# Altium PCB Tigershark 3D R1.6.PcbDoc (part 2 of 4)
Units mil, origin at the board's own origin, x right, y up, seen from the top; angles counter-clockwise.
Board outline 5500 x 4600 mil, 4 copper layers (Top Layer, Groun Plane, Power Plane, Bottom Layer); 326 components, 251 nets, 1041 pads, 903 vias.
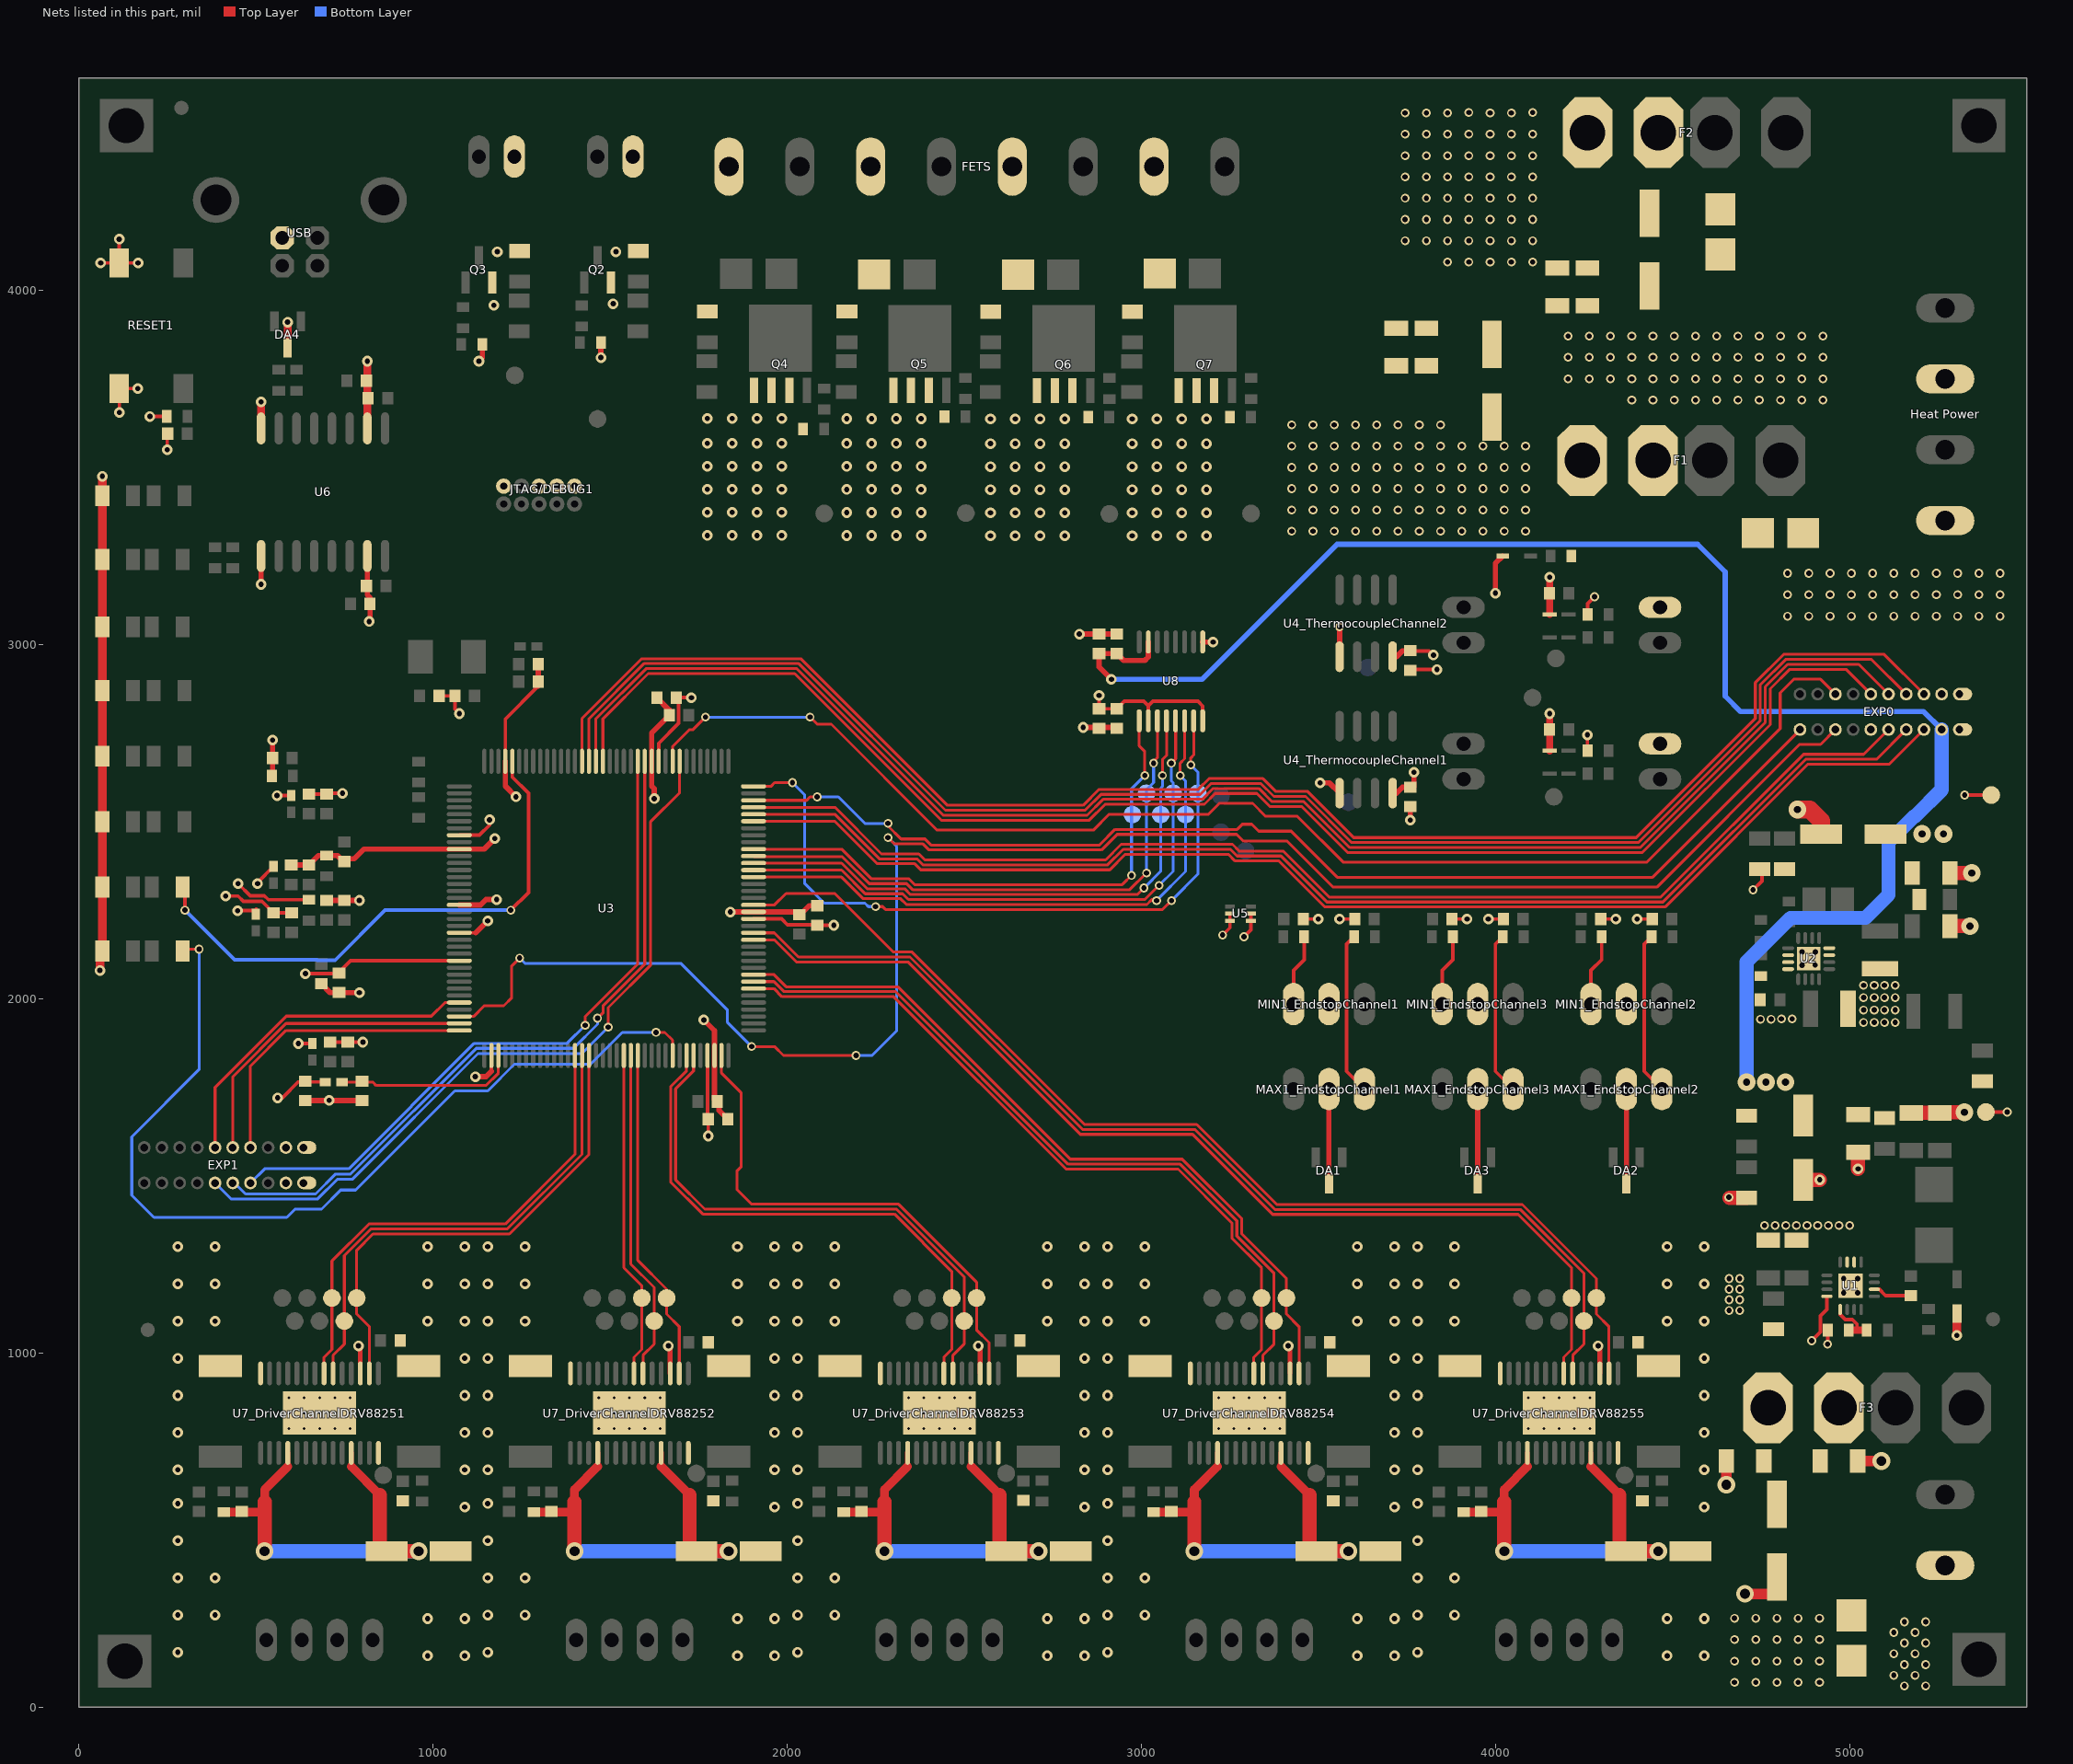
[diagram p4: the nets of this part, all layers, seen from the top]

## Part data
C1_EndstopChannel1 C1_EndstopChannel2 C1_EndstopChannel3 C2_EndstopChannel1 C2_EndstopChannel2 C2_EndstopChannel3 C4 C5 C6 C9 C13 C14 C15 C17 C18 C19 C20 C22 C23 C24 C25 C26 C27 C28 C29 C32 C33 C34 C35 C36 C37 C38 C39 C40 C41 C42 C43 C44 C45 C46 C47 C48 C52 C53 C54 C55 C56 C57 C58 C59 C60 C61 C64 C65 C66_DriverChannelDRV88251 C66_DriverChannelDRV88252 C66_DriverChannelDRV88253 C66_DriverChannelDRV88254 C66_DriverChannelDRV88255 C68_DriverChannelDRV88251 C68_DriverChannelDRV88252 C68_DriverChannelDRV88253 C68_DriverChannelDRV88254 C68_DriverChannelDRV88255 C71_DriverChannelDRV88251 C71_DriverChannelDRV88252 C71_DriverChannelDRV88253 C71_DriverChannelDRV88254 C71_DriverChannelDRV88255 C73 C75_DriverChannelDRV88251 C75_DriverChannelDRV88252 C75_DriverChannelDRV88253 C75_DriverChannelDRV88254 C75_DriverChannelDRV88255: library part "Cap Semi", "Capacitor (Semiconductor SIM Model)"
C3 C12 C16 C69_DriverChannelDRV88251 C69_DriverChannelDRV88252 C69_DriverChannelDRV88253 C69_DriverChannelDRV88254 C69_DriverChannelDRV88255: library part "Cap Pol1", "Polarized Capacitor (Radial)"
C7 C8 C10 C11 C30_ThermistorChannel1 C30_ThermistorChannel2 C31_ThermocoupleChannel1 C31_ThermocoupleChannel2 C63: "Capacitor (Semiconductor SIM Model)"
D1: library part "D Zener", "Zener Diode"
D2 D3 D7 D9 D20 D21 D22 D23 D24 D25: "Typical RED, GREEN, YELLOW, AMBER GaAs LED"
D4 D6 D8 D12 D15 D17 D19: library part "D Schottky", "Schottky Diode"
D5: "Default Diode"
D10 D11 D13 D14 D16 D18: "Typical RED GaAs LED"
D11_ThermistorChannel1 D11_ThermistorChannel2 D12_ThermistorChannel1 D12_ThermistorChannel2: "High Conductance Fast Diode"
DA1 DA2 DA3 DA4: "PESDxL2BT TVS Diode Array 2x"
F1 F2 F3 F4: library part "Fuse 1", "Fuse"
FB2 FB3 L2: library part Inductor, "Inductor"
FETS: library part con-phoenix-508
"Heat Power": library part con-phoenix-508_4
M1_DriverChannelDRV88251 M1_DriverChannelDRV88252 M1_DriverChannelDRV88253 M1_DriverChannelDRV88254 M1_DriverChannelDRV88255: library part "Molex 0705430003 Alt", "Molex 4 Pin Clip Connector"
MAX1_EndstopChannel1 MAX1_EndstopChannel2 MAX1_EndstopChannel3 MIN1_EndstopChannel1 MIN1_EndstopChannel2 MIN1_EndstopChannel3: library part "Molex Endstop"
"Motor Power": library part con-phoenix-508_2
Q2 Q3 Q4 Q5 Q6 Q7: "N-Channel MOSFET"
R1 R7 R8 R9 R10 R11 R13_ThermistorChannel1 R13_ThermistorChannel2 R14_ThermistorChannel1 R14_ThermistorChannel2 R21 R24 R25: "Resistor"
R2_EndstopChannel1 R2_EndstopChannel2 R2_EndstopChannel3 R3_EndstopChannel1 R3_EndstopChannel2 R3_EndstopChannel3 R4 R5 R6 R12 R13 R15 R16 R18 R19 R20 R22 R23 R28 R29 R30_DriverChannelDRV88251 R30_DriverChannelDRV88252 R30_DriverChannelDRV88253 R30_DriverChannelDRV88254 R30_DriverChannelDRV88255 R31_DriverChannelDRV88251 R31_DriverChannelDRV88252 R31_DriverChannelDRV88253 R31_DriverChannelDRV88254 R31_DriverChannelDRV88255 R32_DriverChannelDRV88251 R32_DriverChannelDRV88252 R32_DriverChannelDRV88253 R32_DriverChannelDRV88254 R32_DriverChannelDRV88255 R33_DriverChannelDRV88251 R33_DriverChannelDRV88252 R33_DriverChannelDRV88253 R33_DriverChannelDRV88254 R33_DriverChannelDRV88255 R34 R35 R36 R37 R38 R39 R40 R45 R46 R47 R52 R55 R56 R58 R59 R60 R62 R63 R64 R66 R67 R68 R70 R71: library part Res3, "Resistor"
TP1 TP2 TP3 TP4 TP5 TP6 TP7 TP8 TP32_DriverChannelDRV88251 TP32_DriverChannelDRV88252 TP32_DriverChannelDRV88253 TP32_DriverChannelDRV88254 TP32_DriverChannelDRV88255 TP33_DriverChannelDRV88251 TP33_DriverChannelDRV88252 TP33_DriverChannelDRV88253 TP33_DriverChannelDRV88254 TP33_DriverChannelDRV88255 TP34_DriverChannelDRV88251 TP34_DriverChannelDRV88252 TP34_DriverChannelDRV88253 TP34_DriverChannelDRV88254 TP34_DriverChannelDRV88255 TP35_DriverChannelDRV88251 TP35_DriverChannelDRV88252 TP35_DriverChannelDRV88253 TP35_DriverChannelDRV88254 TP35_DriverChannelDRV88255 TP36_DriverChannelDRV88251 TP36_DriverChannelDRV88252 TP36_DriverChannelDRV88253 TP36_DriverChannelDRV88254 TP36_DriverChannelDRV88255 TP37_DriverChannelDRV88251 TP37_DriverChannelDRV88252 TP37_DriverChannelDRV88253 TP37_DriverChannelDRV88254 TP37_DriverChannelDRV88255 TP38 TP39_DriverChannelDRV88251 TP39_DriverChannelDRV88252 TP39_DriverChannelDRV88253 TP39_DriverChannelDRV88254 TP39_DriverChannelDRV88255 TP40_DriverChannelDRV88251 TP40_DriverChannelDRV88252 TP40_DriverChannelDRV88253 TP40_DriverChannelDRV88254 TP40_DriverChannelDRV88255 TP41 TP42 TP43 TP44 TP45 TP46 TP47 TP48 TP49 TP50 TP51 TP52_ThermistorChannel1 TP52_ThermistorChannel2: library part Socket, "Socket"
U2: "Buck Step Down Regulator with 3 to 17 V Input and 3.3 V Output, -40 to 85 degC, 16-Pin QFN (RGT), Green (RoHS & no Sb/Br)"
U4_ThermocoupleChannel1 U4_ThermocoupleChannel2: "Cold Junction Compensated Thermocouple to Digital Converter, 14 Bits Temperature Resolution, -40 to 125 degC, 8-Pin SOIC (S8+4), Pb-Free"
U6: "USB Opto Isolator"
U7_DriverChannelDRV88251 U7_DriverChannelDRV88252 U7_DriverChannelDRV88253 U7_DriverChannelDRV88254 U7_DriverChannelDRV88255: "DRV8825 Ti Stepper Driver"
U8: library part TXB0106, "TXB0106 - Bidriectional Opendrain/pushpull level shift"
X2: library part XTAL, "Crystal Oscillator"

## Free pads (board coordinates)
  rect 150x150 hole 100: ""(130,130) ""(135,4465) ""(5365,135) ""(5365,4465)

## Via types
v1: diameter 25, hole 15, Top Layer to Bottom Layer, tented both sides, 432 vias
v2: diameter 30, hole 15, Top Layer to Bottom Layer, tented both sides, 366 vias
v3: diameter 19.68, hole 7.87, Top Layer to Bottom Layer, tented both sides, 75 vias
v4: diameter 50, hole 28, Top Layer to Bottom Layer, tented both sides, 13 vias
v5: diameter 50, hole 20, Top Layer to Bottom Layer, tented both sides, 9 vias
v6: diameter 25, hole 15, Top Layer to Bottom Layer, tented bottom, 8 vias

## Nets (pads, with @x,y where several pads share a name; then routed paths per layer and width w, separated by ;. In a path a pad name is that pad's centre, name@x,y a point inside that pad or via, vN(x,y) a via of type N, cw(c..) or ccw(c..) an arc to the next point about the centre after c; other vN are vias at no path point)
3.3VCC: C23.1 C25.2 C26.1 C31_ThermocoupleChannel1.2 C31_ThermocoupleChannel2.2 C35.1 C45.2 C46.2 C47.2 C48.2 C64.2 EXP0.12 EXP1.9 EXP1.12 FB3.2 FB5.1 FB6.1 FB7.1 FB8.1 FB9.1 JTAG/DEBUG1.1@1400,3447 MAX1_EndstopChannel1.3 MAX1_EndstopChannel2.3 MAX1_EndstopChannel3.3 MIN1_EndstopChannel1.3 MIN1_EndstopChannel2.3 MIN1_EndstopChannel3.3 R2_EndstopChannel1.1 R2_EndstopChannel2.1 R2_EndstopChannel3.1 R3_EndstopChannel1.1 R3_EndstopChannel2.1 R3_EndstopChannel3.1 R6.1 R11.2 R13_ThermistorChannel1.2 R13_ThermistorChannel2.2 R21.2 TP3.1 U3.11 U3.62 U3.105 U3.125 U4_ThermocoupleChannel1.4 U4_ThermocoupleChannel2.4 U5.1 U5.2 U5.5 U5.6 U7_DriverChannelDRV88251.17 U7_DriverChannelDRV88252.17 U7_DriverChannelDRV88253.17 U7_DriverChannelDRV88254.17 U7_DriverChannelDRV88255.17 U8.2 U8.8 | length 5152.1
  Top Layer w10: v2(201,3644) R21.2@248.47,3644 ; v2(449,2248.62) 501.22,2248.62 FB5.1@501.22,2252.8 ; v2(450,2325) 484,2291 524.19,2291 535.66,2279.53 R6.1@650,2279.53 ; v2(505,2325) 505,2328.62 FB7.1@550,2373.62 ; v2(560,2573.62) FB8.1@600,2573.62 ; v2(562,1720) 575,1720 620,1765 FB9.1@696.38,1765 ; v2(620,1873.62) FB6.1@660,1873.62 ; v2(640,2070.81) 715,2070.81 ; C48.2@735,2072.56 735,2075 767.36,2107.36 U3.62@1074.65,2107.36 ; U3.11@1637.64,2670.35 1637.64,2721.18 1694.19,2777.73 1694.19,2843.37 C47.2@1687.56,2850 v2(1730,2850) ; C45.2@1775.43,1660 U3.105@1775.43,1839.65 ; v2(1777.44,1612.56) C45.2@1777.44,1660 ; U3.125@1905.35,2225.47 1984.53,2225.47 2000.81,2209.19 2083.25,2209.19 C46.2@2085,2207.44 v2(2132.44,2207.44) ; v2(2881,2856) C25.2@2881,2818.56 C26.1@2931,2818.56 2952.44,2840 3007,2840 3020.02,2826.98 ; U8.2@3020.02,2784.78 3020.02,2826.98 ; U8.8@3173.57,2784.78 3173.57,2826.43 3160,2840 3033.05,2840 3020.02,2826.98 ; v1(3230,2180) 3250.47,2200.47 U5.6@3250.47,2220.32 U5.5@3250.47,2240 ; v1(3290,2175) 3309.53,2194.53 U5.1@3309.53,2220.32 U5.2@3309.53,2240 ; MIN1_EndstopChannel1.3@3430,1985 3430,2080 3460,2110 R3_EndstopChannel1.1@3460,2175 ; R2_EndstopChannel1.1@3600.95,2175 3580,2154.06 3580,1795 MAX1_EndstopChannel1.3@3630,1745 ; C31_ThermocoupleChannel2.2@3775,2982.05 3812.95,2982.05 v2(3825,2970) ; MIN1_EndstopChannel3.3@3850,1985 3850,2080 3880,2110 R3_EndstopChannel3.1@3880,2175 ; R2_EndstopChannel3.1@4020.95,2175 4000,2154.06 4000,1795 MAX1_EndstopChannel3.3@4050,1745 ; v2(4260,2745) 4260,2700.47 R13_ThermistorChannel1.2@4260.47,2700 ; R13_ThermistorChannel2.2@4260.47,3085 4260.47,3115.47 v1(4280,3135) ; MIN1_EndstopChannel2.3@4270,1985 4270,2080 4300,2110 R3_EndstopChannel2.1@4300,2175 ; R2_EndstopChannel2.1@4440.95,2175 4420,2154.06 4420,1795 MAX1_EndstopChannel2.3@4470,1745 ; v1(5325,2575) TP3.1@5400,2575
  Top Layer w14: v2(790,1020) 795,1020 U7_DriverChannelDRV88251.17@795,942.36 ; v2(1665,1020) 1670,1020 U7_DriverChannelDRV88252.17@1670,942.36 ; v2(2540,1020) 2545,1020 U7_DriverChannelDRV88253.17@2545,942.36 ; v2(3415,1020) 3420,1020 U7_DriverChannelDRV88254.17@3420,942.36 ; v2(4290,1020) 4295,1020 U7_DriverChannelDRV88255.17@4295,942.36
  Top Layer w15: U4_ThermocoupleChannel1.4@3710,2580.51 3721.02,2580.51 3737.56,2597.05 3770,2597.05 v2(3770,2639.49) ; U4_ThermocoupleChannel2.4@3710,2965.51 3721.02,2965.51 3737.56,2982.05 C31_ThermocoupleChannel2.2@3770,2982.05
  other v5: 5205,2465 5265,2465
+5VCC: C9.1 C17.1 C20.1 C34.1 EXP0.9 FB2.2 R8.2 R25.1 TP1.1 U8.15 | length 4612.4
  Top Layer w10: TP1.1@5385,1680 v1@5444,1680
  Top Layer w15: v2(2916,2902) 2881,2937 C20.1@2881,2974.44 C17.1@2931,2974.44 2950.44,2955 3010,2955 3020.02,2965.02 U8.15@3020.02,3007.22
  Bottom Layer w15: v2(2916,2902) 3172,2902 3553,3283 4571,3283 4649,3205 4649,2854 4692,2811 5209,2811 EXP0.9@5260,2760
  Bottom Layer w40: v5(4709.07,1764.53) 4709.07,2104.07 4833.18,2228.18 5045,2228.18 5110,2293.18 5110,2442.12 5183.88,2516 5186,2516 5260,2590 EXP0.9@5260,2760
  other v1: 5445,1680
  other v5: 4764.07,1764.53 4819.07,1764.53
+12VCC1: C16.1 C18.2 C19.2 C66_DriverChannelDRV88251.1 C66_DriverChannelDRV88252.1 C66_DriverChannelDRV88253.1 C66_DriverChannelDRV88254.1 C66_DriverChannelDRV88255.1 C69_DriverChannelDRV88251.1 C69_DriverChannelDRV88252.1 C69_DriverChannelDRV88253.1 C69_DriverChannelDRV88254.1 C69_DriverChannelDRV88255.1 D8.2 F3.2 R24.2 R30_DriverChannelDRV88251.1 R30_DriverChannelDRV88252.1 R30_DriverChannelDRV88253.1 R30_DriverChannelDRV88254.1 R30_DriverChannelDRV88255.1 U7_DriverChannelDRV88251.4 U7_DriverChannelDRV88251.11 U7_DriverChannelDRV88252.4 U7_DriverChannelDRV88252.11 U7_DriverChannelDRV88253.4 U7_DriverChannelDRV88253.11 U7_DriverChannelDRV88254.4 U7_DriverChannelDRV88254.11 U7_DriverChannelDRV88255.4 U7_DriverChannelDRV88255.11 | length 6255.1
  Top Layer w14: 590.43,679.43 U7_DriverChannelDRV88251.4@590.43,717.8 ; 769.57,679.43 U7_DriverChannelDRV88251.11@769.57,717.8 ; 1465.43,679.43 U7_DriverChannelDRV88252.4@1465.43,717.8 ; 1644.57,679.43 U7_DriverChannelDRV88252.11@1644.57,717.8 ; 2340.43,679.43 U7_DriverChannelDRV88253.4@2340.43,717.8 ; 2519.57,679.43 U7_DriverChannelDRV88253.11@2519.57,717.8 ; 3215.43,679.43 U7_DriverChannelDRV88254.4@3215.43,717.8 ; 3394.57,679.43 U7_DriverChannelDRV88254.11@3394.57,717.8 ; 4090.43,679.43 U7_DriverChannelDRV88255.4@4090.43,717.8 ; 4269.57,679.43 U7_DriverChannelDRV88255.11@4269.57,717.8
  Top Layer w25: R30_DriverChannelDRV88251.1@410,550.47 525,550.47 ; 525,580 525,614 590.43,679.43 ; 769.57,679.43 850,599 ; R30_DriverChannelDRV88252.1@1285,550.47 1400,550.47 ; 1400,580 1400,614 1465.43,679.43 ; 1644.57,679.43 1725,599 ; R30_DriverChannelDRV88253.1@2160,550.47 2275,550.47 ; 2275,580 2275,614 2340.43,679.43 ; 2519.57,679.43 2600,599 ; R30_DriverChannelDRV88254.1@3035,550.47 3150,550.47 ; 3150,580 3150,614 3215.43,679.43 ; 3394.57,679.43 3475,599 ; R30_DriverChannelDRV88255.1@3910,550.47 4025,550.47 ; 4025,580 4025,614 4090.43,679.43 ; 4269.57,679.43 4350,599
  Top Layer w40: v4(525,440) 525,580 ; C69_DriverChannelDRV88251.1@850,440.55 850,599 ; C69_DriverChannelDRV88251.1@869.45,440 v4(960,440) ; v4(1400,440) 1400,580 ; C69_DriverChannelDRV88252.1@1725,440.55 1725,599 ; C69_DriverChannelDRV88252.1@1744.45,440 v4(1835,440) ; v4(2275,440) 2275,580 ; C69_DriverChannelDRV88253.1@2600,440.55 2600,599 ; C69_DriverChannelDRV88253.1@2619.45,440 v4(2710,440) ; v4(3150,440) 3150,580 ; C69_DriverChannelDRV88254.1@3475,440.55 3475,599 ; C69_DriverChannelDRV88254.1@3494.45,440 v4(3585,440) ; v4(4025,440) 4025,580 ; C69_DriverChannelDRV88255.1@4350,440.55 4350,599 ; C69_DriverChannelDRV88255.1@4369.45,440 v4(4460,440)
  Bottom Layer w40: v4@530,440 v4(960,440) ; v4@1405,440 v4(1835,440) ; v4@2280,440 v4(2710,440) ; v4@3155,440 v4(3585,440) ; v4@4030,440 v4(4460,440)
  other v1: 4675,70 4735,70 4795,70 4855,70 4915,70 4675,130 4735,130 4795,130 4855,130 4915,130 4675,191 4735,191 4795,191 4855,191 4915,191 4675,251 4735,251 4795,251 4855,251 4915,251 4660,1120 4690,1120 4660,1150 4690,1150 4660,1180 4690,1180 4660,1210 4690,1210
+12VCC2: C12.1 C14.2 C15.2 D6.2 D15.2 D17.2 F1.2 FAN-1.1 FAN-2.1 FETS.1 FETS.3 FETS.5 R1.2 R13.1 R47.1 R56.2 R60.2 R64.2
  other v1: 3425,3320 3485,3320 3545,3320 3605,3320 3665,3320 3725,3320 3785,3320 3845,3320 3905,3320 3965,3320 4025,3320 4085,3320 3425,3380 3485,3380 3545,3380 3605,3380 3665,3380 3725,3380 3785,3380 3845,3380 3905,3380 3965,3380 4025,3380 4085,3380 3425,3440 3485,3440 3545,3440 3605,3440 3665,3440 3725,3440 3785,3440 3845,3440 3905,3440 3965,3440 4025,3440 4085,3440 3425,3500 3485,3500 3545,3500 3605,3500 3665,3500 3725,3500 3785,3500 3845,3500 3905,3500 3965,3500 4025,3500 4085,3500 3425,3560 3485,3560 3545,3560 3605,3560 3665,3560 3725,3560 3785,3560 3845,3560 3905,3560 3965,3560 4025,3560 4085,3560 3425,3620 3485,3620 3545,3620 3605,3620 3665,3620 3725,3620 3785,3620 3845,3620
+12VCC3: C3.1 C5.2 C6.2 D4.2 D19.2 F2.2 FETS.7 R68.2
  other v1: 3865,4080 3925,4080 3985,4080 4045,4080 4105,4080 3745,4140 3805,4140 3865,4140 3925,4140 3985,4140 4045,4140 4105,4140 3745,4200 3805,4200 3865,4200 3925,4200 3985,4200 4045,4200 4105,4200 3745,4260 3805,4260 3865,4260 3925,4260 3985,4260 4045,4260 4105,4260 3745,4320 3805,4320 3865,4320 3925,4320 3985,4320 4045,4320 4105,4320 3745,4380 3805,4380 3865,4380 3925,4380 3985,4380 4045,4380 4105,4380 3745,4441 3805,4441 3865,4441 3925,4441 3985,4441 4045,4441 4105,4441 3745,4501 3805,4501 3865,4501 3985,4501 4045,4501 3925,4502 4105,4502
AVREF: C65.2 FB9.2 U3.75 | length 509.5
  Top Layer w8: FB9.2@743.62,1765 830,1765 840,1755 1149.75,1755 1184.88,1790.13 U3.75@1184.88,1839.65
BED_PWM: TP38.1 U3.144 U8.7 | length 2039.8
  Top Layer w8: U3.144@1905.35,2599.49 1954.49,2599.49 1965,2610 v1(2015,2610) ; v1(2250,2260) 2270,2260 2278,2252 3060.14,2252 v1@3087.78,2279.64 ; v1(3140,2660) 3140,2680 3148.39,2688.39 U8.7@3148.39,2784.78
  Bottom Layer w8: v1(2015,2610) 2050,2575 2050,2325 2105,2270 2220,2270 2230,2260 v1(2250,2260) ; v1@3087.78,2279.64 3160,2351.86 3160,2640 v1(3140,2660)
  other v1: 3085.71,2277.22
BST: C7.2 U1.10 | length 110.4
  Top Layer w10: U1.10@5070,1179.68 5083.66,1179.68 5101.37,1161.97 C7.2@5173.07,1161.97
DIR1: TP39_DriverChannelDRV88251.1 U3.87 U7_DriverChannelDRV88251.20 | length 1414
  Top Layer w8: U7_DriverChannelDRV88251.20@718.39,942.2 718.39,993.39 750,1025 TP39_DriverChannelDRV88251.1@750,1090 750,1274.8 825.2,1350 1210.2,1350 1421,1560.8 1421,1839.54 U3.87@1421.1,1839.65
DIR2: TP39_DriverChannelDRV88252.1 U3.94 U7_DriverChannelDRV88252.20 | length 937.9
  Top Layer w8: U3.94@1558.9,1839.65 1558.9,1251.1 1625,1185 TP39_DriverChannelDRV88252.1@1625,1090 1625,1025 1593.39,993.39 U7_DriverChannelDRV88252.20@1593.39,942.2
DIR3: TP39_DriverChannelDRV88253.1 U3.103 U7_DriverChannelDRV88253.20 | length 1586
  Top Layer w8: U3.103@1736.06,1839.65 1736.06,1796.06 1685.32,1745.32 1685.32,1488.67 1767.99,1406 2309.2,1406 2500,1215.2 TP39_DriverChannelDRV88253.1@2500,1090 2500,1025 2468.39,993.39 U7_DriverChannelDRV88253.20@2468.39,942.2
DIR4: TP39_DriverChannelDRV88254.1 U3.116 U7_DriverChannelDRV88254.20 | length 2131.7
  Top Layer w8: U3.116@1905.35,2048.31 1963.1,2048.31 1991.53,2019.88 2306.73,2019.88 2793.61,1533 3109.99,1533 3270,1372.99 3270,1330 3375,1225 TP39_DriverChannelDRV88254.1@3375,1090 3375,1025 3343.39,993.39 U7_DriverChannelDRV88254.20@3343.39,942.2
DIR5: TP39_DriverChannelDRV88255.1 U3.123 U7_DriverChannelDRV88255.20 | length 3038.8
  Top Layer w8: U3.123@1905.35,2186.1 1964.1,2186.1 2032.32,2117.88 2347.32,2117.88 2834.2,1631 3150.99,1631 3376.99,1405 4070.2,1405 4250,1225.2 TP39_DriverChannelDRV88255.1@4250,1090 4250,1025 4218.39,993.39 U7_DriverChannelDRV88255.20@4218.39,942.2
DIR_EXP1: EXP1.6 U3.13 | length 2026.6
  Top Layer w8: v1(1465,1945) 1481,1961 1481,1980.8 1598.27,2098.07 U3.13@1598.27,2670.35
  Bottom Layer w8: EXP1.6@445,1475 471,1449 669,1449 725,1505 767.6,1505 1122.6,1860 1396.82,1860 1465,1928.18 v1(1465,1945)
DIR_EXP2: EXP1.15 U3.71 | length 901.7
  Top Layer w8: EXP1.15@435,1580 435,1779.8 585.4,1930.2 U3.71@1074.65,1930.2
DRV_RESET1: TP34_DriverChannelDRV88251.1 U3.88 U7_DriverChannelDRV88251.16 | length 1409.4
  Top Layer w8: U7_DriverChannelDRV88251.16@820.75,942.2 820.75,1074.25 785,1110 TP34_DriverChannelDRV88251.1@785,1155 785,1290 831,1336 1216,1336 1440.79,1560.79 U3.88@1440.79,1839.65
DRV_RESET2: TP34_DriverChannelDRV88252.1 U3.95 U7_DriverChannelDRV88252.16 | length 946
  Top Layer w8: U3.95@1578.58,1839.65 1578.58,1261.42 1660,1180 TP34_DriverChannelDRV88252.1@1660,1155 1660,1110 1695.75,1074.25 U7_DriverChannelDRV88252.16@1695.75,942.2
DRV_RESET3: TP34_DriverChannelDRV88253.1 U3.107 U7_DriverChannelDRV88253.16 | length 1463.1
  Top Layer w8: U3.107@1814.8,1839.65 1814.8,1790.2 1870,1735 1870,1524.6 1858.5,1513.1 1858.5,1461.7 1900.2,1420 2315,1420 2535,1200 TP34_DriverChannelDRV88253.1@2535,1155 2535,1065 2570.75,1029.25 U7_DriverChannelDRV88253.16@2570.75,942.2
DRV_RESET4: TP34_DriverChannelDRV88254.1 U3.117 U7_DriverChannelDRV88254.16 | length 2167.7
  Top Layer w8: U3.117@1905.35,2067.99 1963.21,2067.99 1997.32,2033.88 2312.53,2033.88 2799.41,1547 3115.79,1547 3284,1378.79 3284,1336 3410,1210 TP34_DriverChannelDRV88254.1@3410,1155 3410,1110 3445.75,1074.25 U7_DriverChannelDRV88254.16@3445.75,942.2
DRV_RESET5: TP34_DriverChannelDRV88255.1 U3.127 U7_DriverChannelDRV88255.16 | length 3126
  Top Layer w8: U3.127@1905.35,2264.84 1964.84,2264.84 1997.23,2297.23 2135.16,2297.23 2300.5,2131.88 2353.12,2131.88 2840,1645 3156.79,1645 3382.79,1419 4076,1419 4285,1210 TP34_DriverChannelDRV88255.1@4285,1155 4285,1110 4320.75,1074.25 U7_DriverChannelDRV88255.16@4320.75,942.2
DRV_RESET_EXP1: EXP1.7 U3.14 | length 1936.2
  Top Layer w8: v1(1430,1925) 1430,1949.6 1578.58,2098.18 U3.14@1578.58,2670.35
  Bottom Layer w8: EXP1.7@485,1480 525,1520 762.8,1520 1116.8,1874 1379,1874 v1(1430,1925)
DRV_RESET_EXP2: EXP1.14 U3.72 | length 861.3
  Top Layer w8: EXP1.14@485,1580 485,1810 585.51,1910.51 U3.72@1074.65,1910.51
EN1: TP32_DriverChannelDRV88251.1 U3.86 U7_DriverChannelDRV88251.21 | length 1416.5
  Top Layer w8: U7_DriverChannelDRV88251.21@692.8,942.2 692.8,987.8 715,1010 TP32_DriverChannelDRV88251.1@715,1155 715,1259.6 819.4,1364 1204.4,1364 1401.42,1561.02 U3.86@1401.42,1839.65
EN2: TP32_DriverChannelDRV88252.1 U3.93 U7_DriverChannelDRV88252.21 | length 927.7
  Top Layer w8: U3.93@1539.21,1839.65 1539.21,1240.79 1590,1190 TP32_DriverChannelDRV88252.1@1590,1155 1590,1010 1567.8,987.8 U7_DriverChannelDRV88252.21@1567.8,942.2
EN3: TP32_DriverChannelDRV88253.1 U3.102 U7_DriverChannelDRV88253.21 | length 1571.1
  Top Layer w8: U3.102@1716.38,1839.65 1716.38,1796.38 1671.32,1751.32 1671.32,1482.87 1762.2,1392 2303.4,1392 2465,1230.4 TP32_DriverChannelDRV88253.1@2465,1155 2465,1010 2442.8,987.8 U7_DriverChannelDRV88253.21@2442.8,942.2
EN4: TP32_DriverChannelDRV88254.1 U3.115 U7_DriverChannelDRV88254.21 | length 2093.6
  Top Layer w8: U3.115@1905.35,2028.62 1962.99,2028.62 1985.73,2005.88 2300.93,2005.88 2787.81,1519 3104.2,1519 3256,1367.2 3256,1324.2 3340,1240.2 TP32_DriverChannelDRV88254.1@3340,1155 3340,1010 3317.8,987.8 U7_DriverChannelDRV88254.21@3317.8,942.2
EN5: TP32_DriverChannelDRV88255.1 U3.122 U7_DriverChannelDRV88255.21 | length 3000.6
  Top Layer w8: U3.122@1905.35,2166.42 1963.78,2166.42 2026.32,2103.88 2341.52,2103.88 2828.4,1617 3145.2,1617 3371.2,1391 4064.4,1391 4215,1240.4 TP32_DriverChannelDRV88255.1@4215,1155 4215,1010 4192.8,987.8 U7_DriverChannelDRV88255.21@4192.8,942.2
EN_EXP1: EXP1.5 U3.8 | length 2163.4
  Top Layer w8: v1(1495,1920) 1495,1975 1615,2095 1615,2500 1696.69,2581.69 U3.8@1696.69,2670.35
  Bottom Layer w8: EXP1.5@385,1480 430,1435 675,1435 730,1490 772.4,1490 1127.4,1845 1420,1845 v1(1495,1920)
EN_EXP2: EXP1.16 U3.68 | length 958.5
  Top Layer w8: EXP1.16@385,1580 385,1749.6 586.4,1951 996,1951 1034.25,1989.25 U3.68@1074.65,1989.25
EXP_CS: EXP0.1 U3.142 | length 3278.5
  Top Layer w8: U3.142@1905.35,2560.12 2055.12,2560.12 2065,2570 v1(2085,2570) ; v1(2285,2495) 2285,2488.18 2322.18,2451 2389.6,2451 2406.6,2434 2882.19,2434 2926.12,2477.93 3271.11,2477.93 3285.68,2492.5 3312.3,2492.5 3331.8,2473 3423.61,2473 3553.61,2343 4444.01,2343 4860,2758.99 EXP0.1@4860,2760
  Bottom Layer w8: v1(2085,2570) 2145,2570 2220,2495 v1(2285,2495)
EXP_INTERRUP1: EXP0.16 U3.19 | length 4326.6
  Top Layer w8: U3.19@1480.16,2670.35 1480.16,2790.16 1608,2918 2021.6,2918 2435.6,2504 2853.2,2504 2898.2,2549 3178.4,2549 3208.9,2579.5 3326.31,2579.5 3362.81,2543 3452.6,2543 3582.6,2413 4415.01,2413 4776,2773.99 4776,2874.99 4831.01,2930 4990,2930 EXP0.16@5060,2860
EXP_INTERRUP2: EXP0.15 U3.20 | length 4408.1
  Top Layer w8: U3.20@1460.47,2670.35 1460.47,2790.47 1602,2932 2027.4,2932 2441.4,2518 2847.4,2518 2892.4,2563 3172.6,2563 3203.1,2593.5 3332.11,2593.5 3368.61,2557 3458.4,2557 3588.4,2427 4409.21,2427 4762,2779.79 4762,2880.79 4825.21,2944 5026,2944 EXP0.15@5110,2860
EXP_SYNC: EXP0.6 U3.141 | length 3541.9
  Top Layer w8: U3.141@1905.35,2540.43 2135.2,2540.43 2266.63,2409 2372.21,2409 2389.21,2392 2899.59,2392 2943.51,2435.93 3257.66,2435.93 3276.58,2417 3400.41,2417 3530.41,2287 4467.2,2287 4870.2,2690 5040,2690 EXP0.6@5110,2760
EXT0_LED: R34.2 U3.32 | length 1564.6
  Top Layer w10: R34.2@293.31,2315 300,2308.31 v1(300,2250) ; v1(1220,2250) 1270,2300 1270,2580 1224.25,2625.75 U3.32@1224.25,2670.35
  Bottom Layer w10: v1(300,2250) 440,2110 673.23,2110 674.23,2109 724,2109 865,2250 v1(1220,2250)
EXT1_LED: R29.2 U3.100 | length 2637.2
  Top Layer w8: R29.2@298.31,2140 v1(340,2140) ; v1(1630,1905) 1655,1905 1677.01,1882.99 U3.100@1677.01,1839.65
  Bottom Layer w8: v1(340,2140) 340,1800 150,1610 150,1445 212.5,1382.5 587.5,1382.5 611,1406 685.8,1406 739.8,1460 782,1460 1062,1740 1155,1740 1230,1815 1445,1815 1535,1905 v1(1630,1905)
FB: R7.1 R10.2 U1.5 | length 134.9
  Top Layer w10: U1.5@4973.54,1122.6 4973.54,1108.94 4987.96,1094.53 5008.07,1094.53 5020.81,1081.79 5020.81,1064.53
  Top Layer w20: R10.2@4998.07,1064.53 R7.1@5043.54,1064.53
FET_PWM1: TP43.1 U3.135 U8.1 | length 1581.4
  Top Layer w8: U3.135@1905.35,2422.32 2154.31,2422.32 2237.64,2339 2343.21,2339 2360.21,2322 2946.29,2322 v1@2974.64,2350.36 ; U8.1@2994.43,2784.78 2994.43,2713.57 3010,2698 v1(3010,2630)
  Bottom Layer w8: v1(2972.57,2347.93) 2972.57,2592.57 v1(3010,2630)
FET_PWM2: TP44.1 U3.134 U8.3 | length 1610.8
  Top Layer w8: U3.134@1905.35,2402.64 1906.99,2401 2155.84,2401 2231.84,2325 2337.41,2325 2354.41,2308 2967.64,2308 v1@3014.82,2355.18 ; v1(3035,2665) 3035,2669.8 3046.02,2680.82 U8.3@3046.02,2784.78
  Bottom Layer w8: v1(3015,2355) TP44.1@3015,2580 3015,2590 3035,2610 v1(3035,2665)
FET_PWM3: TP45.1 U3.133 U8.4 | length 1645.5
  Top Layer w8: U3.133@1905.35,2382.95 2154.08,2382.95 2226.54,2310.5 2332.11,2310.5 2348.61,2294 2989,2294 v1@3010,2315 ; v1(3060,2630) 3060,2675 3071.61,2686.61 U8.4@3071.61,2784.78
  Bottom Layer w8: v1@3010,2315 3055,2360 3055,2594.5 3060,2599.5 v1(3060,2630)
  other v1: 3007.93,2312.57
FET_PWM4: TP46.1 U3.132 U8.5 | length 1684.4
  Top Layer w8: U3.132@1905.35,2363.27 2033.27,2363.27 2033.31,2363.31 2153.93,2363.31 2220.74,2296.5 2326.32,2296.5 2342.82,2280 3010.2,2280 3052.27,2322.07 v1@3052.43,2322.07 ; v1(3085,2665) 3097.2,2677.2 U8.5@3097.2,2784.78
  Bottom Layer w8: v1@3052.43,2322.07 3090,2359.64 3090,2610 3085,2615 v1(3085,2665)
  other v1: 3050.36,2319.64
FET_PWM5: TP47.1 U3.131 U8.6 | length 1727.4
  Top Layer w8: U3.131@1905.35,2343.58 2131.64,2343.58 2131.77,2343.45 2153.99,2343.45 2214.94,2282.5 2320.52,2282.5 2337.02,2266 3016,2266 3029.64,2279.64 v1@3045.36,2279.64 ; v1(3110,2630) 3110,2665 3122.8,2677.8 U8.6@3122.8,2784.78
  Bottom Layer w8: v1@3045.36,2279.64 3125,2359.29 3125,2615 v1(3110,2630)
  other v1: 3043.28,2277.22
GND: "Heat Power.2" "Heat Power.4" "Motor Power.2" C1_EndstopChannel1.2 C1_EndstopChannel2.2 C1_EndstopChannel3.2 C2_EndstopChannel1.2 C2_EndstopChannel2.2 C2_EndstopChannel3.2 C3.2 C4.2 C5.1 C6.1 C8.1 C9.2 C10.1 C11.1 C12.2 C13.1 C14.1 C15.1 C16.2 C17.2 C18.1 C19.1 C20.2 C22.2 C23.2 C24.1 C25.1 C26.2 C27.1 C28.1 C29.2 C30_ThermistorChannel1.1 C30_ThermistorChannel2.1 C31_ThermocoupleChannel1.1 C31_ThermocoupleChannel2.1 C32.1 C33.1 C34.2 C35.2 C36.1 C37.1 C38.1 C39.1 C40.1 C41.1 C42.1 C43.1 C44.1 C45.1 C46.1 C47.1 C48.1 C52.2 C53.1 C54.1 C55.1 C56.1 C57.1 C60.1 C61.1 C63.1 C64.1 C65.1 C69_DriverChannelDRV88251.2 C69_DriverChannelDRV88252.2 C69_DriverChannelDRV88253.2 C69_DriverChannelDRV88254.2 C69_DriverChannelDRV88255.2 C71_DriverChannelDRV88251.1 C71_DriverChannelDRV88252.1 C71_DriverChannelDRV88253.1 C71_DriverChannelDRV88254.1 C71_DriverChannelDRV88255.1 C73.1 C75_DriverChannelDRV88251.1 C75_DriverChannelDRV88252.1 C75_DriverChannelDRV88253.1 C75_DriverChannelDRV88254.1 C75_DriverChannelDRV88255.1 D1.1 D2.2 D3.2 D4.1 D5.1 D6.1 D7.1 D8.1 D9.1 D12_ThermistorChannel1.1 D12_ThermistorChannel2.1 D20.2 D21.2 D22.2 D23.2 D24.2 D25.2 DA1.3 DA2.3 DA3.3 EXP0.10 EXP0.11 EXP1.10 EXP1.11 JTAG/DEBUG1.3 JTAG/DEBUG1.5 JTAG/DEBUG1.9 MAX1_EndstopChannel1.2 MAX1_EndstopChannel2.2 MAX1_EndstopChannel3.2 MIN1_EndstopChannel1.2 MIN1_EndstopChannel2.2 MIN1_EndstopChannel3.2 P2_ThermistorChannel1.2 P2_ThermistorChannel2.2 Q2.2 Q3.2 Q4.1 Q4.2 Q4.3 Q5.1 Q5.2 Q5.3 Q6.1 Q6.2 Q6.3 Q7.1 Q7.2 Q7.3 R4.2 R10.1 R23.1 R32_DriverChannelDRV88251.1 R32_DriverChannelDRV88252.1 R32_DriverChannelDRV88253.1 R32_DriverChannelDRV88254.1 R32_DriverChannelDRV88255.1 R33_DriverChannelDRV88251.1 R33_DriverChannelDRV88252.1 R33_DriverChannelDRV88253.1 R33_DriverChannelDRV88254.1 R33_DriverChannelDRV88255.1 R38.1 R46.2 R55.2 R59.2 R63.2 R67.2 R71.2 RESET1.2 U1.4 U1.14 U1.15 U1.17 U2.6 U2.7 U2.8 U2.15 U2.16 U2.17 U3.12 U3.33 U3.44 U3.46 U3.54 U3.58 U3.74 U3.106 U3.126 U4_ThermocoupleChannel1.1 U4_ThermocoupleChannel2.1 U6.9 U6.15 U7_DriverChannelDRV88251.14 U7_DriverChannelDRV88251.28 U7_DriverChannelDRV88251.29 U7_DriverChannelDRV88252.14 U7_DriverChannelDRV88252.28 U7_DriverChannelDRV88252.29 U7_DriverChannelDRV88253.14 U7_DriverChannelDRV88253.28 U7_DriverChannelDRV88253.29 U7_DriverChannelDRV88254.14 U7_DriverChannelDRV88254.28 U7_DriverChannelDRV88254.29 U7_DriverChannelDRV88255.14 U7_DriverChannelDRV88255.28 U7_DriverChannelDRV88255.29 U8.9 | length 8364.5
  Top Layer w10: v2(62.17,4077.17) RESET1.2@114.45,4077.17 ; v2(114.45,4144.45) RESET1.2@114.45,4077.17 ; v2(115,3655) 115,3722.28 RESET1.2@114.45,3722.83 v2(167.17,3722.83) ; v2(167.83,4077.17) RESET1.2@114.45,4077.17 ; v2(250,3550) 250,3593.56 C63.1@251.44,3595 ; v2(415,2290) 450,2290 465,2275 517.56,2275 C55.1@550,2242.56 C54.1@601.22,2242.56 ; C61.1@650,2577.56 C60.1@700,2577.56 702.44,2580 v2(745,2580) ; C27.1@710,1877.56 C13.1@760,1877.56 v2(802.44,1877.56) ; C43.1@1017.56,2855 C44.1@1062.44,2855 1062.44,2817.56 v2(1075,2805) ; U3.58@1074.65,2186.1 1121.1,2186.1 ; U3.44@1074.65,2461.69 1131.69,2461.69 1160,2490 v2(1160,2505) ; 1165.2,1795.2 U3.74@1165.2,1839.65 ; U3.33@1204.57,2670.35 1204.57,2789.18 1295.39,2880 1297.19,2880 1297.56,2880.37 C33.1@1297.56,2895 ; C2_EndstopChannel1.2@3457.56,2225 v2(3500,2225) ; v2(3560,2225) C1_EndstopChannel1.2@3602.91,2225 ; C31_ThermocoupleChannel2.1@3777.56,2929.49 v2(3835,2929.49) ; C2_EndstopChannel3.2@3877.56,2225 v2(3920,2225) ; v2(3980,2225) C1_EndstopChannel3.2@4022.91,2225 ; C2_EndstopChannel2.2@4297.56,2225 v2(4340,2225) ; v2(4400,2225) C1_EndstopChannel2.2@4442.91,2225 ; v1(4727.55,2307.45) 4752.55,2332.45 4752.55,2359.3 D9.1@4746.06,2365.79 ; v1(4893.07,1034.53) 4918.07,1059.53 4918.07,1104.53 4936.14,1122.6 U1.4@4936.14,1160 ; v1(4938.07,1024.53) R10.1@4938.07,1064.06
  Top Layer w15: v2(515,3170) U6.9@515,3249.88 ; R23.1@547.44,2630.75 v2(547.44,2730) ; C28.1@600,2377.56 C53.1@650,2377.56 676.97,2404.53 R4.2@700,2404.53 730.47,2404.53 740,2395 778.23,2395 805.55,2422.32 U3.46@1074.65,2422.32 1144.84,2422.32 v2(1175,2452.48) ; C64.1@640,1712.44 C65.1@800,1712.44 ; C42.1@685,2042.44 710,2017.44 C48.1@735,2017.44 v2(792.56,2017.44) ; C37.1@700,2277.56 C36.1@750,2277.56 v2(792.44,2277.56) ; U6.15@815,3249.88 815,3140 822.56,3132.44 C56.1@822.56,3115 v2@822.56,3067.56 ; U3.54@1074.65,2264.84 1134.84,2264.84 1150,2280 v2(1180,2280) ; v2(1120,1780) 1150,1780 1165.2,1795.2 ; 1121.1,2186.1 v2(1155,2220) ; v2(1130,3800) 1139.53,3809.53 R55.2@1139.53,3847.58 ; U3.33@1204.57,2670.35 1204.57,2600.16 v2(1234.72,2570) ; C33.1@1297.56,2895 C32.1@1297.56,2945 ; v2(1474.53,3810) R46.2@1474.53,3852.58 ; v2(1625,2565) 1625,2593.11 1617.95,2600.16 U3.12@1617.95,2670.35 1617.95,2750.51 C38.1@1667.44,2800 1667.44,2815 C47.1@1632.44,2850 ; v2(1764.96,1940) 1795.12,1909.84 U3.106@1795.12,1839.65 1795.12,1715.13 1808.07,1702.18 1808.07,1684.92 C45.1@1832.99,1660 ; v2@1835.16,2245.16 U3.126@1905.35,2245.16 2045.16,2245.16 2062.56,2262.56 C46.1@2085,2262.56 ; v2(2825.44,3029.56) C20.2@2881,3029.56 C17.2@2931,3029.56 ; v2(2836,2766) C26.2@2928.44,2766 ; U8.9@3173.57,3007.22 3202.78,3007.22 v2(3203,3007) ; v2(3505,2609.49) 3531.02,2609.49 U4_ThermocoupleChannel1.1@3560,2580.51 ; DA1.3@3530,1477.6 MAX1_EndstopChannel1.2@3530,1745 ; U4_ThermocoupleChannel2.1@3560,2965.51 v1(3560,3050) ; v2(3760,2504.49) C31_ThermocoupleChannel1.1@3760,2542.44 ; DA3.3@3950,1477.6 MAX1_EndstopChannel3.2@3950,1745 ; v2(4000,3145) 4000,3229.37 D1.1@4020.63,3250 ; DA2.3@4370,1477.6 MAX1_EndstopChannel2.2@4370,1745
  Top Layer w20: D12_ThermistorChannel1.1@4153.43,2700 v2(4153.43,2805) ; D12_ThermistorChannel2.1@4153.43,3085 v2(4153.43,3190)
  Top Layer w25: v2(60,2080) D20.2@60,2128.31 ; D20.2@66.69,2135 D21.2@66.69,2315 D22.2@66.69,2500 D23.2@66.69,2685 D24.2@66.69,2870 D2.2@66.69,3050 D3.2@66.69,3240 v2(66.69,3475) ; v2(5303.07,1049.53) D5.1@5303.07,1111.3
  Top Layer w30: v4(4651.85,628.15) C18.1@4651.85,695 ; v4(4705,320) 4795,320 C16.2@4795,367.64 ; C19.1@5023.15,695 v4(5090,695)
  Top Layer w40: v1@4660.69,1437.91 D7.1@4709.07,1437.91 ; C9.2@4869.07,1488.98 v2(4915.92,1488.98) ; v2(5024.07,1519.53) C34.2@5024.07,1566.38 ; C29.2@5174.07,1677.68 C8.1@5255.07,1677.68 ; C8.1@5256.92,1679.53 v5(5324.07,1679.53) ; C52.2@5283.15,2205 v5(5340,2205) ; C35.2@5283.15,2355 v5(5345,2355)
  Top Layer w50: v5(4852.55,2534.27) 4887.55,2534.27 4920,2501.82 C23.2@4920,2465
  other v1: 5155,60 5215,60 5125,90 5185,90 5155,120 5215,120 5125,151 5185,151 5155,181 5215,181 5125,211 5185,211 5155,241 5215,241 4760,1360 4790,1360 4820,1360 4850,1360 4880,1360 4910,1360 4940,1360 4970,1360 5000,1360 4659.08,1439.52 5039.55,1933.18 5069.55,1933.18 5098.55,1933.18 5128.55,1933.18 4748.55,1942.18 4778.55,1942.18 4807.55,1943.18 4837.55,1943.18 5039.55,1968.18 5069.55,1968.18 5098.55,1968.18 5128.55,1968.18 5039.55,2003.18 5069.55,2003.18 5098.55,2003.18 5128.55,2003.18 5039.55,2038.18 5069.55,2038.18 5098.55,2038.18 5128.55,2038.18 4825,3080 4885,3080 4945,3080 5005,3080 5065,3080 5125,3080 5185,3080 5245,3080 5305,3080 5365,3080 5425,3080 4825,3141 4885,3141 4945,3141 5005,3141 5065,3141 5125,3141 5185,3141 5245,3141 5305,3141 5365,3141 5425,3141 4825,3201 4885,3201 4945,3201 5005,3201 5065,3201 5125,3201 5185,3201 5245,3201 5305,3201 5365,3201 5425,3201 4385,3690 4445,3690 4505,3690 4565,3690 4625,3690 4685,3690 4745,3690 4805,3690 4865,3690 4925,3690 4205,3750 4265,3750 4325,3750 4385,3750 4445,3750 4505,3750 4565,3750 4625,3750 4685,3750 4745,3750 4805,3750 4865,3750 4925,3750 4205,3811 4265,3811 4325,3811 4385,3811 4445,3811 4505,3811 4565,3811 4625,3811 4685,3811 4745,3811 4805,3811 4865,3811 4925,3811 4205,3871 4265,3871 4325,3871 4385,3871 4445,3871 4505,3871 4565,3871 4625,3871 4685,3871 4745,3871 4805,3871 4865,3871 4925,3871
  other v2: 985,145 1090,145 1860,145 1965,145 2735,145 2840,145 3610,145 3715,145 4485,145 4590,145 280,155 1155,155 2030,155 2905,155 3780,155 985,250 1090,250 1860,250 1965,250 2735,250 2840,250 3610,250 3715,250 4485,250 4590,250 280,260 385,260 1155,260 1260,260 2030,260 2135,260 2905,260 3010,260 3780,260 3885,260 280,365 385,365 1155,365 1260,365 2030,365 2135,365 2905,365 3010,365 3780,365 3885,365 280,470 1155,470 2030,470 2905,470 3780,470 1090,565 1965,565 2840,565 3715,565 4590,565 280,575 1155,575 2030,575 2905,575 3780,575 280,670 1090,670 1155,670 1965,670 2030,670 2840,670 2905,670 3715,670 3780,670 4590,670 280,775 1090,775 1155,775 1965,775 2030,775 2840,775 2905,775 3715,775 3780,775 4590,775 280,880 1090,880 1155,880 1965,880 2030,880 2840,880 2905,880 3715,880 3780,880 4590,880 280,985 1090,985 1155,985 1965,985 2030,985 2840,985 2905,985 3715,985 3780,985 4590,985 280,1090 385,1090 985,1090 1090,1090 1155,1090 1260,1090 1860,1090 1965,1090 2030,1090 2135,1090 2735,1090 2840,1090 2905,1090 3010,1090 3610,1090 3715,1090 3780,1090 3885,1090 4485,1090 4590,1090 280,1195 385,1195 985,1195 1090,1195 1155,1195 1260,1195 1860,1195 1965,1195 2030,1195 2135,1195 2735,1195 2840,1195 2905,1195 3010,1195 3610,1195 3715,1195 3780,1195 3885,1195 4485,1195 4590,1195 280,1300 385,1300 985,1300 1090,1300 1155,1300 1260,1300 1860,1300 1965,1300 2030,1300 2135,1300 2735,1300 2840,1300 2905,1300 3010,1300 3610,1300 3715,1300 3780,1300 3885,1300 4485,1300 4590,1300 707,1713 1840,2245 820,3065 2574.5,3307.19 2644.5,3307.19 2714.5,3307.19 2784.5,3307.19 2974.5,3307.19 3044.5,3307.19 3114.5,3307.19 3184.5,3307.19 1775,3308 1845,3308 1915,3308 1985,3308 2168.5,3307.61 2238.5,3307.61 2308.5,3307.61 2378.5,3307.61 2574.5,3372.19 2644.5,3372.19 2714.5,3372.19 2784.5,3372.19 2974.5,3372.19 3044.5,3372.19 3114.5,3372.19 3184.5,3372.19 1775,3373 1845,3373 1915,3373 1985,3373 2168.5,3372.61 2238.5,3372.61 2308.5,3372.61 2378.5,3372.61 2574.5,3437.19 2644.5,3437.19 2714.5,3437.19 2784.5,3437.19 2974.5,3437.19 3044.5,3437.19 3114.5,3437.19 3184.5,3437.19 1775,3438 1845,3438 1915,3438 1985,3438 2168.5,3437.61 2238.5,3437.61 2308.5,3437.61 2378.5,3437.61 2574.5,3502.19 2644.5,3502.19 2714.5,3502.19 2784.5,3502.19 2974.5,3502.19 3044.5,3502.19 3114.5,3502.19 3184.5,3502.19 1775,3503 1845,3503 1915,3503 1985,3503 2168.5,3502.61 2238.5,3502.61 2308.5,3502.61 2378.5,3502.61 2574.5,3567.19 2644.5,3567.19 2714.5,3567.19 2784.5,3567.19 2974.5,3567.19 3044.5,3567.19 3114.5,3567.19 3184.5,3567.19 1775,3568 1845,3568 1915,3568 1985,3568 2168.5,3567.61 2238.5,3567.61 2308.5,3567.61 2378.5,3567.61 2574.5,3637.19 2644.5,3637.19 2714.5,3637.19 2784.5,3637.19 2974.5,3637.19 3044.5,3637.19 3114.5,3637.19 3184.5,3637.19 1775,3638 1845,3638 1915,3638 1985,3638 2168.5,3637.61 2238.5,3637.61 2308.5,3637.61 2378.5,3637.61 1172,3958 1509,3962 1182,4109 1517,4109
  other v3: 593.39,786.69 636.69,786.69 680,786.69 723.31,786.69 766.61,786.69 1468.39,786.69 1511.69,786.69 1555,786.69 1598.31,786.69 1641.61,786.69 2343.39,786.69 2386.69,786.69 2430,786.69 2473.31,786.69 2516.61,786.69 3218.39,786.69 3261.69,786.69 3305,786.69 3348.31,786.69 3391.61,786.69 4093.39,786.69 4136.69,786.69 4180,786.69 4223.31,786.69 4266.61,786.69 593.39,830 636.69,830 680,830 723.31,830 766.61,830 1468.39,830 1511.69,830 1555,830 1598.31,830 1641.61,830 2343.39,830 2386.69,830 2430,830 2473.31,830 2516.61,830 3218.39,830 3261.69,830 3305,830 3348.31,830 3391.61,830 4093.39,830 4136.69,830 4180,830 4223.31,830 4266.61,830 593.39,873.31 636.69,873.31 680,873.31 723.31,873.31 766.61,873.31 1468.39,873.31 1511.69,873.31 1555,873.31 1598.31,873.31 1641.61,873.31 2343.39,873.31 2386.69,873.31 2430,873.31 2473.31,873.31 2516.61,873.31 3218.39,873.31 3261.69,873.31 3305,873.31 3348.31,873.31 3391.61,873.31 4093.39,873.31 4136.69,873.31 4180,873.31 4223.31,873.31 4266.61,873.31
  other v6: 4983.07,1169.53 5023.07,1169.53 4983.07,1209.53 5023.07,1209.53 4865.55,2094.18 4902.55,2095.18 4865.55,2132.18 4903.55,2132.18
GPIO0_EXP: EXP0.7 U3.140 | length 3595.4
  Top Layer w8: U3.140@1905.35,2520.75 2135.08,2520.75 2260.83,2395 2366.41,2395 2383.41,2378 2905.39,2378 2949.31,2421.93 3251.86,2421.93 3270.78,2403 3394.61,2403 3524.61,2273 4473.2,2273 4876.2,2676 5076,2676 EXP0.7@5160,2760
GPIO1_EXP: EXP0.8 U3.139 | length 3648.8
  Top Layer w8: U3.139@1905.35,2501.06 2134.97,2501.06 2255.03,2381 2360.61,2381 2377.61,2364 2911.18,2364 2955.11,2407.93 3246.06,2407.93 3264.98,2389 3388.82,2389 3518.82,2259 4479,2259 4882,2662 5112,2662 EXP0.8@5210,2760
GPIO2_EXP: EXP0.14 U3.21 | length 4489.6
  Top Layer w8: U3.21@1440.79,2670.35 1440.79,2790.79 1596,2946 2033.2,2946 2447.2,2532 2841.6,2532 2886.6,2577 3166.8,2577 3197.3,2607.5 3337.91,2607.5 3374.41,2571 3464.2,2571 3594.2,2441 4403.41,2441 4748,2785.59 4748,2886.59 4819.41,2958 5062,2958 EXP0.14@5160,2860
GPIO3_EXP: EXP0.13 U3.22 | length 4571
  Top Layer w8: U3.22@1421.1,2670.35 1421.1,2791.1 1590,2960 2038.99,2960 2452.99,2546 2835.8,2546 2880.8,2591 3161,2591 3191.5,2621.5 3343.71,2621.5 3380.21,2585 3470,2585 3600,2455 4397.61,2455 4734,2791.39 4734,2892.39 4813.61,2972 5098,2972 EXP0.13@5210,2860
I2C_SCL: EXP0.3 U3.70 | length 5028.9
  Top Layer w8: U3.70@1074.65,1949.88 1114.88,1949.88 1145,1980 1200,1980 1222.5,2002.5 1222.5,2092.5 v1(1245,2115) ; v1(1900,1865) 1965,1865 1990,1840 v1(2195,1840) ; v1(2285,2455) 2303,2437 2383.8,2437 2400.8,2420 2887.99,2420 2931.92,2463.93 3269.25,2463.93 3288.18,2445 3412.01,2445 3542.01,2315 4455.6,2315 4858.6,2718 4918,2718 EXP0.3@4960,2760
  Bottom Layer w8: v1(1245,2115) 1260,2100 1699.71,2100 1831.96,1967.75 1831.96,1933.04 v1(1900,1865) ; v1(2195,1840) 2240.2,1840 2310,1909.8 2310,2430 v1(2285,2455)
I2C_SDA: EXP0.18 U3.9 | length 3882.1
  Top Layer w8: U3.9@1677.01,2670.35 1677.01,2712.01 1725,2760 1735,2760 v1(1770,2795) ; v1(2065,2795) 2085,2775 2125,2775 2424,2476 2864.79,2476 2909.79,2521 3189.99,2521 3220.49,2551.5 3314.72,2551.5 3351.22,2515 3441.01,2515 3571.01,2385 4426.61,2385 4804,2762.39 4804,2863.4 4842.6,2902 4918,2902 EXP0.18@4960,2860
  Bottom Layer w8: v1(1770,2795) v1(2065,2795)
INPUT_GND: C58.1 C59.1 DA4.3 U6.2 U6.8 USB.4 | length 337.2
  Top Layer w22: U6.8@515,3610.12 v2(515,3685) ; DA4.3@590,3837.6 v2(590,3910) ; U6.2@815,3610.12 v2(815,3800)
KRESET: EXP0.5